# Altium PCB Mach_nguon.PcbDoc
Units mil, origin at the board's own origin, x right, y up, seen from the top; angles counter-clockwise.
Board outline 3555.03 x 1645.03 mil, 2 copper layers (Top Layer, Bottom Layer); 76 components, 9 nets, 176 pads, 16 vias.
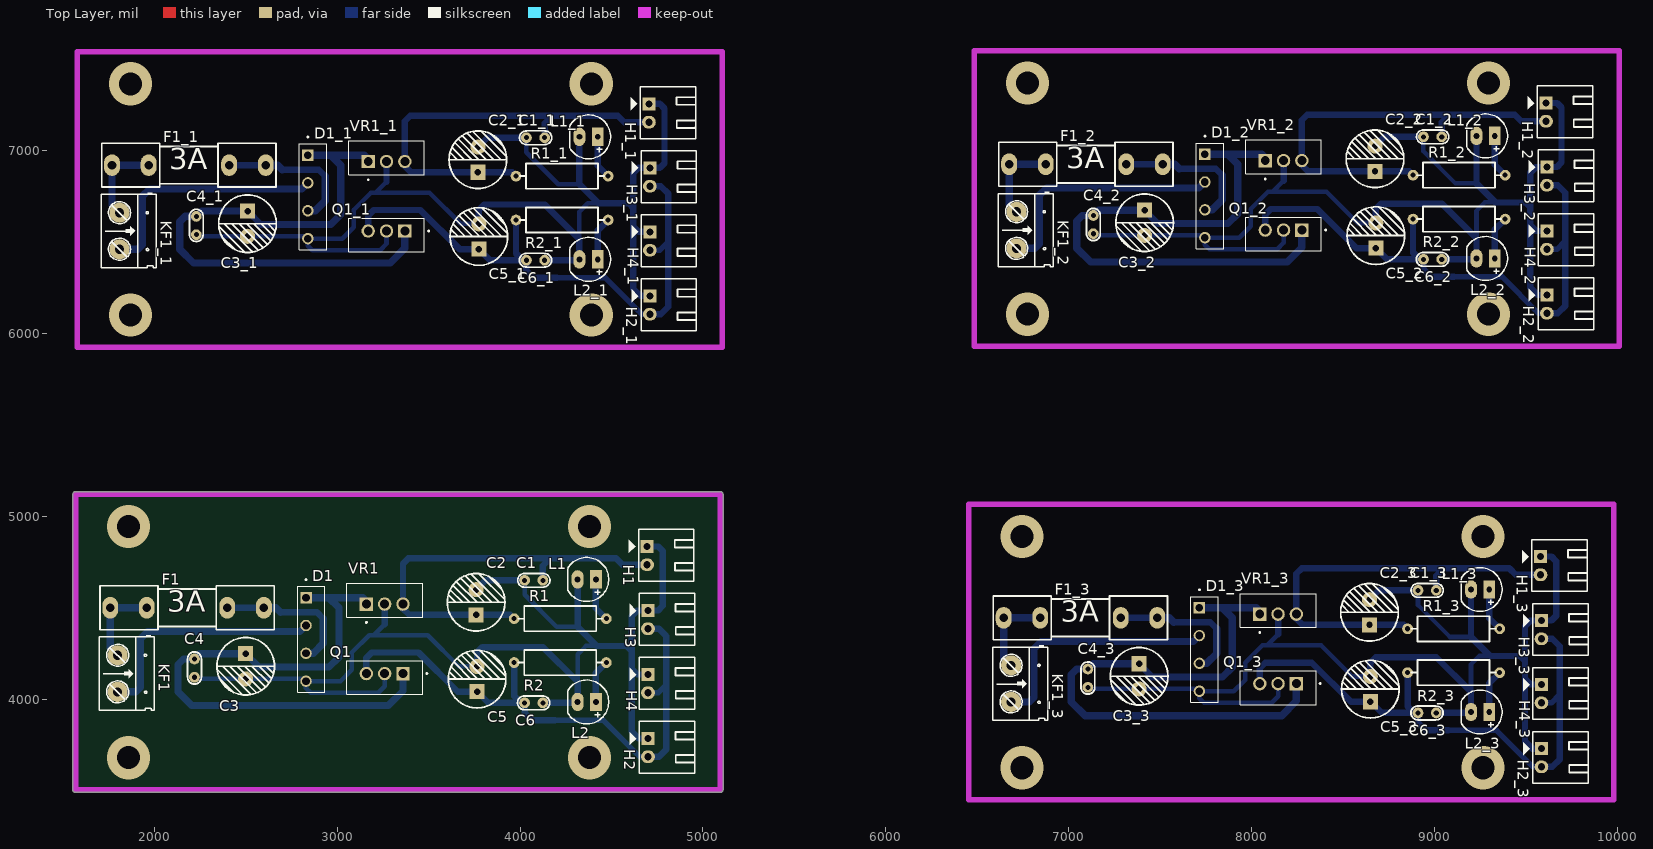
[diagram p0: Top Layer view]
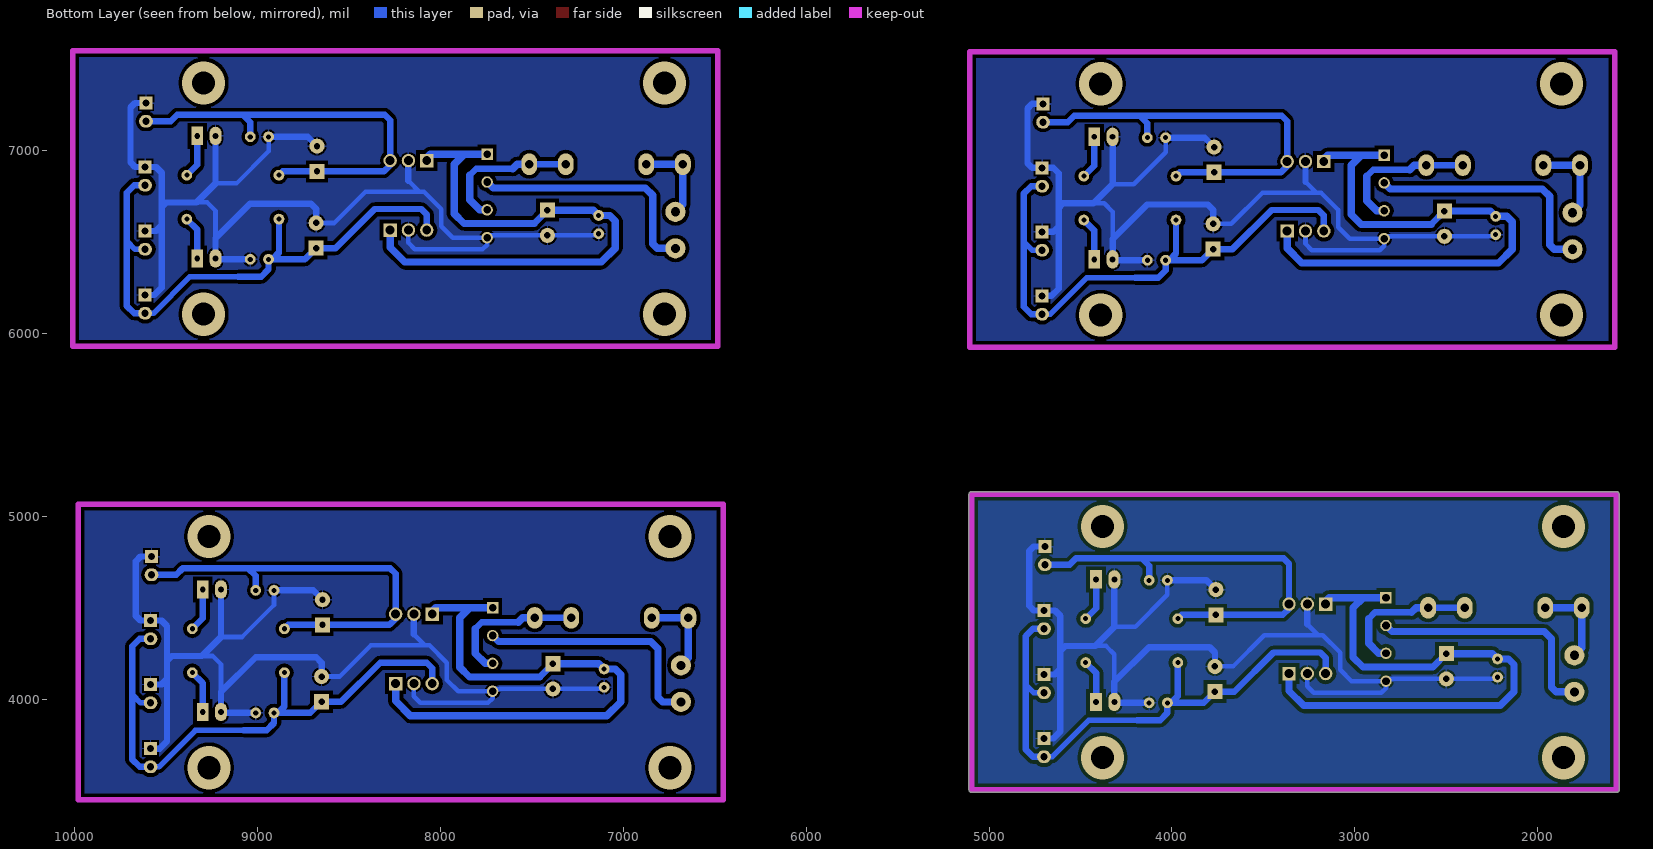
[diagram p1: Bottom Layer view, seen from below]

## Layer stack, top to bottom
Top Solder: solder mask 0.4, Solder Resist, Dk 3.5
Top Layer: signal copper 1.4
Dielectric 1: dielectric 12.6, FR-4, Dk 4.8
Bottom Layer: signal copper 1.4
Bottom Solder: solder mask 0.4, Solder Resist, Dk 3.5

## Board outline
1570,3489.99 cw(c1570,3505) 1554.98,3505 1554.98,5120 cw(c1570,5120) 1570,5135.02 5095,5135.02 cw(c5095,5120) 5110.02,5120 5110.02,3505 cw(c5095,3505) 5095,3489.99

## Design rules (kind name [scope] priority, off if disabled: settings)
Clearance [All] p1: gap=20
PolygonConnect [All] p1: connectstyle=Relief reliefconductorwidth=10 reliefentries=4 polygonreliefangle="90 Angle" airgapwidth=10
RoutingVias [All] p1: holewidth=28 width=50 viastyle="Through Hole" minholewidth=28 minwidth=50 maxholewidth=28 maxwidth=50
SolderMaskExpansion [All] p1: expansion=4
Width [All] p1: maxlimit=40 minlimit=25 preferedwidth=35
30 further rules are at their usual default settings.

## Classes and differential pairs
component class Mach_nguon: C1 C2 C3 C4 C5 C6 D1 F1 H1 H2 H3 H4 KF1 L1 L2 Q1 R1 R2 VR1

## Components (designator, comment, footprint, x,y, rotation, side; value= is the part's Value field where it differs from the comment)
C1 "0.1uF" "tu gom" 4075,4650 r180 top
C1_1 "0.1uF" "tu gom" 4085,7070 r180 top (schematic designator C1)
C1_2 "0.1uF" "tu gom" 8990,7075 r180 top (schematic designator C1)
C1_3 "0.1uF" "tu gom" 8960,4595 r180 top (schematic designator C1)
C2 "470uF" "tu hoa 8mm" 3760,4530 r90 top
C2_1 "470uF" "tu hoa 8mm" 3770,6950 r90 top (schematic designator C2)
C2_2 "470uF" "tu hoa 8mm" 8675,6955 r90 top (schematic designator C2)
C2_3 "470uF" "tu hoa 8mm" 8645,4475 r90 top (schematic designator C2)
C3 "1000uF" "tu hoa 8mm" 2500,4180 r270 top
C3_1 "1000uF" "tu hoa 8mm" 2510,6600 r270 top (schematic designator C3)
C3_2 "1000uF" "tu hoa 8mm" 7415,6605 r270 top (schematic designator C3)
C3_3 "1000uF" "tu hoa 8mm" 7385,4125 r270 top (schematic designator C3)
C4 "0.1uF" "tu gom" 2220,4170 r270 top
C4_1 "0.1uF" "tu gom" 2230,6590 r270 top (schematic designator C4)
C4_2 "0.1uF" "tu gom" 7135,6595 r270 top (schematic designator C4)
C4_3 "0.1uF" "tu gom" 7105,4115 r270 top (schematic designator C4)
C5 "470uF" "tu hoa 8mm" 3765,4110 r90 top
C5_1 "470uF" "tu hoa 8mm" 3775,6530 r90 top (schematic designator C5)
C5_2 "470uF" "tu hoa 8mm" 8680,6535 r90 top (schematic designator C5)
C5_3 "470uF" "tu hoa 8mm" 8650,4055 r90 top (schematic designator C5)
C6 "0.1uF" "tu gom" 4075,3980 r0 top
C6_1 "0.1uF" "tu gom" 4085,6400 r0 top (schematic designator C6)
C6_2 "0.1uF" "tu gom" 8990,6405 r0 top (schematic designator C6)
C6_3 "0.1uF" "tu gom" 8960,3925 r0 top (schematic designator C6)
D1 "KBP206" SIP380W81P386L1470H1270Q4 2830,4555 r270 top
D1_1 "KBP206" SIP380W81P386L1470H1270Q4 2840,6975 r270 top (schematic designator D1)
D1_2 "KBP206" SIP380W81P386L1470H1270Q4 7745,6980 r270 top (schematic designator D1)
D1_3 "KBP206" SIP380W81P386L1470H1270Q4 7715,4500 r270 top (schematic designator D1)
F1 "F1A" Fuse1 2180,4500 r0 top
F1_1 "F1A" Fuse1 2190,6920 r0 top (schematic designator F1)
F1_2 "F1A" Fuse1 7095,6925 r0 top (schematic designator F1)
F1_3 "F1A" Fuse1 7065,4445 r0 top (schematic designator F1)
H1 "Header 2P 2.54 Duc Cong" "Header 2P DC 2.54" 4695,4835 r0 top
H1_1 "Header 2P 2.54 Duc Cong" "Header 2P DC 2.54" 4705,7255 r0 top (schematic designator H1)
H1_2 "Header 2P 2.54 Duc Cong" "Header 2P DC 2.54" 9610,7260 r0 top (schematic designator H1)
H1_3 "Header 2P 2.54 Duc Cong" "Header 2P DC 2.54" 9580,4780 r0 top (schematic designator H1)
H2 "Header 2P 2.54 Duc Cong" "Header 2P DC 2.54" 4700,3785 r0 top
H2_1 "Header 2P 2.54 Duc Cong" "Header 2P DC 2.54" 4710,6205 r0 top (schematic designator H2)
H2_2 "Header 2P 2.54 Duc Cong" "Header 2P DC 2.54" 9615,6210 r0 top (schematic designator H2)
H2_3 "Header 2P 2.54 Duc Cong" "Header 2P DC 2.54" 9585,3730 r0 top (schematic designator H2)
H3 "Header 2P 2.54 Duc Cong" "Header 2P DC 2.54" 4700,4485 r0 top
H3_1 "Header 2P 2.54 Duc Cong" "Header 2P DC 2.54" 4710,6905 r0 top (schematic designator H3)
H3_2 "Header 2P 2.54 Duc Cong" "Header 2P DC 2.54" 9615,6910 r0 top (schematic designator H3)
H3_3 "Header 2P 2.54 Duc Cong" "Header 2P DC 2.54" 9585,4430 r0 top (schematic designator H3)
H4 "Header 2P 2.54 Duc Cong" "Header 2P DC 2.54" 4700,4135 r0 top
H4_1 "Header 2P 2.54 Duc Cong" "Header 2P DC 2.54" 4710,6555 r0 top (schematic designator H4)
H4_2 "Header 2P 2.54 Duc Cong" "Header 2P DC 2.54" 9615,6560 r0 top (schematic designator H4)
H4_3 "Header 2P 2.54 Duc Cong" "Header 2P DC 2.54" 9585,4080 r0 top (schematic designator H4)
KF1 "CON 2 KF301" "Con 2 KF301 5.08" 1800,4240 r270 top
KF1_1 "CON 2 KF301" "Con 2 KF301 5.08" 1810,6660 r270 top (schematic designator KF1)
KF1_2 "CON 2 KF301" "Con 2 KF301 5.08" 6715,6665 r270 top (schematic designator KF1)
KF1_3 "CON 2 KF301" "Con 2 KF301 5.08" 6685,4185 r270 top (schematic designator KF1)
L1 "LED 5mm" LED-5MM-RED 4415,4655 r180 top
L1_1 "LED 5mm" LED-5MM-RED 4425,7075 r180 top (schematic designator L1)
L1_2 "LED 5mm" LED-5MM-RED 9330,7080 r180 top (schematic designator L1)
L1_3 "LED 5mm" LED-5MM-RED 9300,4600 r180 top (schematic designator L1)
L2 "LED 5mm" LED-5MM-RED 4415,3985 r180 top
L2_1 "LED 5mm" LED-5MM-RED 4425,6405 r180 top (schematic designator L2)
L2_2 "LED 5mm" LED-5MM-RED 9330,6410 r180 top (schematic designator L2)
L2_3 "LED 5mm" LED-5MM-RED 9300,3930 r180 top (schematic designator L2)
Q1 "LM7805CT/NOPB" TO254P1054X470X2600-3 3360,4140 r180 top
Q1_1 "LM7805CT/NOPB" TO254P1054X470X2600-3 3370,6560 r180 top (schematic designator Q1)
Q1_2 "LM7805CT/NOPB" TO254P1054X470X2600-3 8275,6565 r180 top (schematic designator Q1)
Q1_3 "LM7805CT/NOPB" TO254P1054X470X2600-3 8245,4085 r180 top (schematic designator Q1)
R1 "1k" "tro vach 1/2w" 4220,4440 r180 top
R1_1 "1k" "tro vach 1/2w" 4230,6860 r180 top (schematic designator R1)
R1_2 "1k" "tro vach 1/2w" 9135,6865 r180 top (schematic designator R1)
R1_3 "1k" "tro vach 1/2w" 9105,4385 r180 top (schematic designator R1)
R2 "220" "tro vach 1/2w" 4220,4200 r180 top
R2_1 "220" "tro vach 1/2w" 4230,6620 r180 top (schematic designator R2)
R2_2 "220" "tro vach 1/2w" 9135,6625 r180 top (schematic designator R2)
R2_3 "220" "tro vach 1/2w" 9105,4145 r180 top (schematic designator R2)
VR1 "LM7812CT/NOPB" TO254P1054X470X1955-3 3260,4520 r0 top
VR1_1 "LM7812CT/NOPB" TO254P1054X470X1955-3 3270,6940 r0 top (schematic designator VR1)
VR1_2 "LM7812CT/NOPB" TO254P1054X470X1955-3 8175,6945 r0 top (schematic designator VR1)
VR1_3 "LM7812CT/NOPB" TO254P1054X470X1955-3 8145,4465 r0 top (schematic designator VR1)

## Footprints (in the part's own frame and the unit in brackets; to place one, negate y for a bottom-side part, rotate by r counter-clockwise, add the part's x,y. Pads: shape width x height; smd on the part's side, far side on the other; paste and mask are expansions set on the pad)
"Con 2 KF301 5.08" [mil]
  round 110 hole 50: 1(0,0) 2(200,0)
  silkscreen extent -106,-100 300,200, body extent -45,-97 255,190, height 335
Fuse1 [mm]
  oval 2.2x3 hole 1.2: 1(-10.684,0) 1(-5.604,0) 2(5.579,0) 2(10.659,0)
  silkscreen extent -12.12,-3.05 12.09,3.05, body extent -10.84,-2.95 10.87,2.95, height 9.75
"Header 2P DC 2.54" [mil]
  rect 70x70 hole 39.37 unplated: 1(0,0)
  oval 75x70 hole 39.37 unplated: 2(0,-100)
  silkscreen extent -100,-190 255,93, body extent -50,-190 250,90, height 237
LED-5MM-RED [mil] "LED 2 PIN, 5 ly , Only colour,pin to pin 100mil"
  rect 65x100 hole 32: 1(0,0)
  oval 65x100 hole 32: 2(100,0)
  silkscreen extent -70,-120 154,120, body extent -65,-119 149,118, height 339
SIP380W81P386L1470H1270Q4 [mm]
  rect 1.59x1.59 / inner round 1.59 / far side rect 1.59x1.59 hole 1.06: 1(0,0)
  round 1.59 hole 1.06: 2(3.865,0) 3(7.73,0) 4(11.595,0)
  silkscreen extent -2.6,-1.19 13.15,2.61, body extent -1.63,-1.18 13.07,2.62, height 12.7
TO254P1054X470X1955-3 [mm]
  rect 1.86x1.86 / inner round 1.86 / far side rect 1.86x1.86 hole 1.24: 1(-2.54,0)
  round 1.86 hole 1.24: 2(0,0) 3(2.54,0)
  silkscreen extent -5.27,-2.64 5.27,2.86, body extent -5.08,-2.35 5.08,2.35, height 15.49
TO254P1054X470X2600-3 [mm]
  rect 1.86x1.86 / inner round 1.86 / far side rect 1.86x1.86 hole 1.24: 1(0,0)
  round 1.86 hole 1.24: 2(2.54,0) 3(5.08,0)
  silkscreen extent -3.41,-1.8 7.81,2.9, body extent -2.54,-1.63 7.62,2.72, height 20.4
"tro vach 1/2w" [mm]
  round 1.5 hole 0.7: 1(-6.4,0) 2(6.4,0)
  silkscreen extent -5.84,-1.75 5.84,1.75, body extent -6.62,-1.75 6.62,1.75, height 3.5
"tu gom" [mm] "Tu gom mini"
  round 1.5 hole 0.7: 1(-1.27,0) 2(1.27,0)
  silkscreen extent -2.25,-0.97 2.22,0.97, body extent -2.92,-0.85 2.92,0.85, height 6.12
"tu hoa 8mm" [mm]
  rect 2.1x2.1 hole 0.9: 1(-1.75,0)
  round 2.1 hole 0.9: 2(1.75,0)
  silkscreen extent -4,-4 4,4, body extent -4.1,-4.07 4.1,4.13, height 13.81

## Part data
C1 C1_1 C1_2 C1_3 C4 C4_1 C4_2 C4_3 C6 C6_1 C6_2 C6_3: library part "Tu gom 100 50V", "Cắm"
C2 C2_1 C2_2 C2_3 C5 C5_1 C5_2 C5_3: library part "Tu Hoa 470uF 16V 8x11", "Cắm"
C3 C3_1 C3_2 C3_3: library part "Tu Hoa 1000uF 16V 8x20", "Cắm"
D1 D1_1 D1_2 D1_3: "ÛŒÚ©Ø³Ùˆ Ú©Ù†Ù†Ø¯Ù‡ Ù¾Ù„ ØªÚ© ÙØ§Ø² Ø§Ø³ØªØ§Ù†Ø¯Ø§Ø±Ø¯ 600 ÙˆÙ„Øª Ø§Ø² Ø·Ø±ÛŒÙ‚ Ø³ÙˆØ±Ø§Ø® KBP"
F1 F1_1 F1_2 F1_3: library part Fuse, "Fuse"
H1 H1_1 H1_2 H1_3 H2 H2_1 H2_2 H2_3 H3 H3_1 H3_2 H3_3 H4 H4_1 H4_2 H4_3 KF1 KF1_1 KF1_2 KF1_3: "Cắm"
L1 L1_1 L1_2 L1_3 L2 L2_1 L2_2 L2_3: library part "LED 5mm Do", "Cắm"
Q1 Q1_1 Q1_2 Q1_3: "Linear Voltage Regulator IC Positive Fixed 1 Output 1.5A TO-220-3"
R1 R1_1 R1_2 R1_3 R2 R2_1 R2_2 R2_3: library part "Tro Vach 1/2W 5% 1k", "Cắm"
VR1 VR1_1 VR1_2 VR1_3: "1.5-A, 30-V, linear voltage regulator"

## Via types
v1: diameter 236.22, hole 125.98, Top Layer to Bottom Layer, 16 vias

## Nets (pads, with @x,y where several pads share a name; then routed paths per layer and width w, separated by ;. In a path a pad name is that pad's centre, name@x,y a point inside that pad or via, vN(x,y) a via of type N, cw(c..) or ccw(c..) an arc to the next point about the centre after c; other vN are vias at no path point)
5V: C5.1 C6.1 H2.2 H3.2 H4.2 Q1.3 R2.2 | length 3132.8
  Bottom Layer w30: 4190,3885 4455,3885 4655,3685 H2.2 ; H4.2 4755,4035 4800,4080
  Bottom Layer w35: Q1.3 3160,4225 3190,4255 3445,4255 3658.9,4041.1 C5.1 3826.1,3980 C6.1 ; R2.2 3968.03,4016.97 4005,3980 C6.1 ; 4190,3885 4065,3885 4025,3925 C6.1 ; H2.2 4760,3685 4800,3725 4800,4080 4800,4345 4760,4385 H3.2
12V: C1.1 C2.1 H1.2 R1.2 VR1.3 | length 2374.3
  Bottom Layer w35: R1.2 3946.93,4461.1 C2.1 3393.9,4461.1 3360,4495 3360,4740 3390,4770 4165,4770 ; C1.1 4125,4730 4165,4770 ; H1.2 4560,4735 4525,4770 4165,4770
15V: C3.1 C4.1 D1.1 Q1.1 VR1.1 | length 3197.2
  Bottom Layer w25: VR1.1 VR1.1@3160,4535
  Bottom Layer w35: C3.1 2572.9,4176
  Bottom Layer w40: C3.1 2248.9,4248.9 C4.1 2160,4220 2130,4190 2130,4040 2205,3965 3280,3965 3360,4045 Q1.1 ; 2572.9,4176 2956,4176 3010,4230 3010,4500 2955,4555 ; D1.1 2955,4555 ; VR1.1@3160,4535 3140,4555 2955,4555
GND: C1.2 C2.2 C3.2 C4.2 C5.2 C6.2 D1.4 H1.1 H2.1 H3.1 H4.1 L1.2 L2.2 Q1.2 VR1.2 | length 6577.7
  Bottom Layer w25: C4.2 2228.9,4111.1 C3.2 2817.4,4111.1 D1.4 ; Q1.2 3260,4070 3225,4035 2855,4035 2830,4060 D1.4 ; 3260,4410 3200,4350 ; C5.2 3666.1,4178.9 3495,4350 3200,4350 ; C1.2 4025,4570 4200,4395 4315,4395 ; 4315,4095 4315,4245 4361,4291 4419,4291 ; D1.4 3018.5,4098.5 3080,4160 3080,4255 3175,4350 3200,4350
  Bottom Layer w35: 3260,4410 VR1.2@3260,4495 ; C2.2 3811.1,4650 C1.2 ; C5.2 3765,4255 3795,4285 4125,4285 4315,4095 L2.2 4315,3980 C6.2 ; L1.2 4315,4395 4419,4291 4584,4291 4610,4265 ; H1.1 4755,4835 4780,4810 4780,4510 4755,4485 H3.1 4640,4485 4610,4455 4610,4265 ; H2.1 4650,3785 4610,3825 4610,4165 ; H4.1 4640,4135 4610,4165 ; 4610,4165 4610,4265
NetD1_2: D1.2 KF1.2 | length 1335.5
  Bottom Layer w40: KF1.2 1900,4040 1925,4065 1925,4330 1965,4370 2105,4370 2797.17,4370 D1.2
NetD1_3: D1.3 F1.2 | length 802.7
  Bottom Layer w35: F1.2@2399.63,4500 F1.2@2599.63,4500 ; 2690,4475 2890,4475 2925,4440
  Bottom Layer w40: F1.2@2599.63,4500 2665,4500 2690,4475 ; D1.3 2870.67,4250.67 2925,4305 2925,4440
NetF1_1: F1.1 KF1.1 | length 476.8
  Bottom Layer w40: KF1.1 1759.37,4280.63 1759.37,4500 F1.1@1959.37,4500
NetL1_1: L1.1 R1.1 | length 238.6
  Bottom Layer w35: L1.1 4415,4496.97 R1.1
NetL2_1: L2.1 R2.1 | length 238.6
  Bottom Layer w35: L2.1 4415,4143.03 R2.1
pads on no net: C1_1.1 C1_1.2 C1_2.1 C1_2.2 C1_3.1 C1_3.2 C2_1.1 C2_1.2 C2_2.1 C2_2.2 C2_3.1 C2_3.2 C3_1.1 C3_1.2 C3_2.1 C3_2.2 C3_3.1 C3_3.2 C4_1.1 C4_1.2 C4_2.1 C4_2.2 C4_3.1 C4_3.2 C5_1.1 C5_1.2 C5_2.1 C5_2.2 C5_3.1 C5_3.2 C6_1.1 C6_1.2 C6_2.1 C6_2.2 C6_3.1 C6_3.2 D1_1.1 D1_1.2 D1_1.3 D1_1.4 D1_2.1 D1_2.2 D1_2.3 D1_2.4 D1_3.1 D1_3.2 D1_3.3 D1_3.4 F1_1.1 F1_1.2 F1_2.1 F1_2.2 F1_3.1 F1_3.2 H1_1.1 H1_1.2 H1_2.1 H1_2.2 H1_3.1 H1_3.2 H2_1.1 H2_1.2 H2_2.1 H2_2.2 H2_3.1 H2_3.2 H3_1.1 H3_1.2 H3_2.1 H3_2.2 H3_3.1 H3_3.2 H4_1.1 H4_1.2 H4_2.1 H4_2.2 H4_3.1 H4_3.2 KF1_1.1 KF1_1.2 KF1_2.1 KF1_2.2 KF1_3.1 KF1_3.2 L1_1.1 L1_1.2 L1_2.1 L1_2.2 L1_3.1 L1_3.2 L2_1.1 L2_1.2 L2_2.1 L2_2.2 L2_3.1 L2_3.2 Q1_1.1 Q1_1.2 Q1_1.3 Q1_2.1 Q1_2.2 Q1_2.3 Q1_3.1 Q1_3.2 Q1_3.3 R1_1.1 R1_1.2 R1_2.1 R1_2.2 R1_3.1 R1_3.2 R2_1.1 R2_1.2 R2_2.1 R2_2.2 R2_3.1 R2_3.2 VR1_1.1 VR1_1.2 VR1_1.3 VR1_2.1 VR1_2.2 VR1_2.3 VR1_3.1 VR1_3.2 VR1_3.3
copper on no net: | length 55123.1
  Bottom Layer w25: 2230,6540 2238.9,6531.1 2510,6531.1 2827.4,6531.1 2840,6518.5 ; 3170,6940 3170,6955 ; 3270,6560 3270,6490 3235,6455 2865,6455 2840,6480 2840,6518.5 ; 3270,6830 3210,6770 ; 3775,6598.9 3676.1,6598.9 3505,6770 3210,6770 ; 4035,7070 4035,6990 4210,6815 4325,6815 ; 4325,6515 4325,6665 4371,6711 4429,6711 ; 7105,4065 7113.9,4056.1 7385,4056.1 7702.4,4056.1 7715,4043.5 ; 7135,6545 7143.9,6536.1 7415,6536.1 7732.4,6536.1 7745,6523.5 ; 8045,4465 8045,4480 ; 8075,6945 8075,6960 ; 8145,4085 8145,4015 8110,3980 7740,3980 7715,4005 7715,4043.5 ; 8145,4355 8085,4295 ; 8175,6565 8175,6495 8140,6460 7770,6460 7745,6485 7745,6523.5 ; 8175,6835 8115,6775 ; 8650,4123.9 8551.1,4123.9 8380,4295 8085,4295 ; 8680,6603.9 8581.1,6603.9 8410,6775 8115,6775 ; 8910,4595 8910,4515 9085,4340 9200,4340 ; 8940,7075 8940,6995 9115,6820 9230,6820 ; 9200,4040 9200,4190 9246,4236 9304,4236 ; 9230,6520 9230,6670 9276,6716 9334,6716 ; 2840,6518.5 3028.5,6518.5 3090,6580 3090,6675 3185,6770 3210,6770 ; 7715,4043.5 7903.5,4043.5 7965,4105 7965,4200 8060,4295 8085,4295 ; 7745,6523.5 7933.5,6523.5 7995,6585 7995,6680 8090,6775 8115,6775
  Bottom Layer w30: 4200,6305 4465,6305 4665,6105 4710,6105 ; 4710,6455 4765,6455 4810,6500 ; 9075,3830 9340,3830 9540,3630 9585,3630 ; 9105,6310 9370,6310 9570,6110 9615,6110 ; 9585,3980 9640,3980 9685,4025 ; 9615,6460 9670,6460 9715,6505
  Bottom Layer w35: 2409.63,6920 2609.63,6920 ; 2510,6668.9 2582.9,6596 ; 2700,6895 2900,6895 2935,6860 ; 3170,6560 3170,6645 3200,6675 3455,6675 3668.9,6461.1 3775,6461.1 3836.1,6400 4035,6400 ; 3270,6830 3270,6915 ; 3770,7018.9 3821.1,7070 4035,7070 ; 3775,6598.9 3775,6675 3805,6705 4135,6705 4325,6515 4325,6405 4325,6400 4135,6400 ; 3978.03,6620 3978.03,6436.97 4015,6400 4035,6400 ; 3978.03,6860 3956.93,6881.1 3770,6881.1 3403.9,6881.1 3370,6915 3370,7160 3400,7190 4175,7190 ; 4135,7070 4135,7150 4175,7190 ; 4200,6305 4075,6305 4035,6345 4035,6400 ; 4325,7075 4325,6815 4429,6711 4594,6711 4620,6685 ; 4425,6405 4425,6563.03 4481.97,6620 ; 4425,7075 4425,6916.97 4481.97,6860 ; 4705,7155 4570,7155 4535,7190 4175,7190 ; 4705,7255 4765,7255 4790,7230 4790,6930 4765,6905 4710,6905 4650,6905 4620,6875 4620,6685 ; 4710,6105 4770,6105 4810,6145 4810,6500 4810,6765 4770,6805 4710,6805 ; 4710,6205 4660,6205 4620,6245 4620,6585 ; 4710,6555 4650,6555 4620,6585 ; 7284.63,4445 7484.63,4445 ; 7314.63,6925 7514.63,6925 ; 7385,4193.9 7457.9,4121 ; 7415,6673.9 7487.9,6601 ; 7575,4420 7775,4420 7810,4385 ; 7605,6900 7805,6900 7840,6865 ; 8045,4085 8045,4170 8075,4200 8330,4200 8543.9,3986.1 8650,3986.1 8711.1,3925 8910,3925 ; 8075,6565 8075,6650 8105,6680 8360,6680 8573.9,6466.1 8680,6466.1 8741.1,6405 8940,6405 ; 8145,4355 8145,4440 ; 8175,6835 8175,6920 ; 8645,4543.9 8696.1,4595 8910,4595 ; 8650,4123.9 8650,4200 8680,4230 9010,4230 9200,4040 9200,3930 9200,3925 9010,3925 ; 8675,7023.9 8726.1,7075 8940,7075 ; 8680,6603.9 8680,6680 8710,6710 9040,6710 9230,6520 9230,6410 9230,6405 9040,6405 ; 8853.03,4145 8853.03,3961.97 8890,3925 8910,3925 ; 8853.03,4385 8831.93,4406.1 8645,4406.1 8278.9,4406.1 8245,4440 8245,4685 8275,4715 9050,4715 ; 8883.03,6625 8883.03,6441.97 8920,6405 8940,6405 ; 8883.03,6865 8861.93,6886.1 8675,6886.1 8308.9,6886.1 8275,6920 8275,7165 8305,7195 9080,7195 ; 9010,4595 9010,4675 9050,4715 ; 9040,7075 9040,7155 9080,7195 ; 9075,3830 8950,3830 8910,3870 8910,3925 ; 9105,6310 8980,6310 8940,6350 8940,6405 ; 9200,4600 9200,4340 9304,4236 9469,4236 9495,4210 ; 9230,7080 9230,6820 9334,6716 9499,6716 9525,6690 ; 9300,3930 9300,4088.03 9356.97,4145 ; 9300,4600 9300,4441.97 9356.97,4385 ; 9330,6410 9330,6568.03 9386.97,6625 ; 9330,7080 9330,6921.97 9386.97,6865 ; 9580,4680 9445,4680 9410,4715 9050,4715 ; 9580,4780 9640,4780 9665,4755 9665,4455 9640,4430 9585,4430 9525,4430 9495,4400 9495,4210 ; 9585,3630 9645,3630 9685,3670 9685,4025 9685,4290 9645,4330 9585,4330 ; 9585,3730 9535,3730 9495,3770 9495,4110 ; 9585,4080 9525,4080 9495,4110 ; 9610,7160 9475,7160 9440,7195 9080,7195 ; 9610,7260 9670,7260 9695,7235 9695,6935 9670,6910 9615,6910 9555,6910 9525,6880 9525,6690 ; 9615,6110 9675,6110 9715,6150 9715,6505 9715,6770 9675,6810 9615,6810 ; 9615,6210 9565,6210 9525,6250 9525,6590 ; 9615,6560 9555,6560 9525,6590 ; 4620,6585 4620,6685 ; 9495,4110 9495,4210 ; 9525,6590 9525,6690
  Bottom Layer w40: 1810,6460 1910,6460 1935,6485 1935,6750 1975,6790 2115,6790 2807.17,6790 2840,6822.83 ; 1810,6660 1769.37,6700.63 1769.37,6920 1969.37,6920 ; 2510,6668.9 2258.9,6668.9 2230,6640 2170,6640 2140,6610 2140,6460 2215,6385 3290,6385 3370,6465 3370,6560 ; 2582.9,6596 2966,6596 3020,6650 3020,6920 2965,6975 ; 2609.63,6920 2675,6920 2700,6895 ; 2840,6670.67 2880.67,6670.67 2935,6725 2935,6860 ; 2840,6975 2965,6975 ; 3170,6955 3150,6975 2965,6975 ; 6685,3985 6785,3985 6810,4010 6810,4275 6850,4315 6990,4315 7682.17,4315 7715,4347.83 ; 6685,4185 6644.37,4225.63 6644.37,4445 6844.37,4445 ; 6715,6465 6815,6465 6840,6490 6840,6755 6880,6795 7020,6795 7712.17,6795 7745,6827.83 ; 6715,6665 6674.37,6705.63 6674.37,6925 6874.37,6925 ; 7385,4193.9 7133.9,4193.9 7105,4165 7045,4165 7015,4135 7015,3985 7090,3910 8165,3910 8245,3990 8245,4085 ; 7415,6673.9 7163.9,6673.9 7135,6645 7075,6645 7045,6615 7045,6465 7120,6390 8195,6390 8275,6470 8275,6565 ; 7457.9,4121 7841,4121 7895,4175 7895,4445 7840,4500 ; 7484.63,4445 7550,4445 7575,4420 ; 7487.9,6601 7871,6601 7925,6655 7925,6925 7870,6980 ; 7514.63,6925 7580,6925 7605,6900 ; 7715,4195.67 7755.67,4195.67 7810,4250 7810,4385 ; 7715,4500 7840,4500 ; 7745,6675.67 7785.67,6675.67 7840,6730 7840,6865 ; 7745,6980 7870,6980 ; 8045,4480 8025,4500 7840,4500 ; 8075,6960 8055,6980 7870,6980
  other v1: 6745,3625 9265,3625 1860,3680 4380,3680 6745,4890 9265,4890 1860,4945 4380,4945 1870,6100 4390,6100 6775,6105 9295,6105 1870,7365 4390,7365 6775,7370 9295,7370

## Polygon pours and split planes (outlines as drawn)
no net on Bottom Layer "Bottom Layer-No Net" (solid, remove dead copper, pour order 18): 6455,5065 9980,5065 9980,3460 9970,3450 6455,3450
no net on Bottom Layer "Bottom Layer-No Net" (solid, remove dead copper, pour order 16): 6485,7545 10010,7545 10010,5940 10000,5930 6485,5930
no net on Bottom Layer "Bottom Layer-No Net" (solid, remove dead copper, pour order 14): 1580,7540 5105,7540 5105,5935 5095,5925 1580,5925
GND on Bottom Layer "Bottom Layer-No Net" (solid, remove dead copper, pour order 12): 1570,5120 5095,5120 5095,3515 5085,3505 1570,3505

## Keep-outs
Keep-Out Layer:
  lines w30: 1570,3505 1570,5120 5095,5120 5095,3505 1570,3505 ; 1580,5925 5105,5925 5105,7540 1580,7540 1580,5925 ; 6455,3450 9980,3450 9980,5065 6455,5065 6455,3450 ; 6485,5930 10010,5930 10010,7545 6485,7545 6485,5930

## Text inside footprints (layer, text, board x,y; h text height)
F1: Top Overlay "3A" at 2072,4439 h196.85
F1_1: Top Overlay "3A" at 2082,6859 h196.85
F1_2: Top Overlay "3A" at 6987,6864 h196.85
F1_3: Top Overlay "3A" at 6957,4384 h196.85